# Altium PCB taktik_pcb.PcbDoc
Units mm, origin at the board's own origin, x right, y up, seen from the top; angles counter-clockwise.
Board outline 88.65 x 56.13 mm, 2 copper layers (Top Layer, Bottom Layer); 26 components, 13 nets, 90 pads, 0 vias.
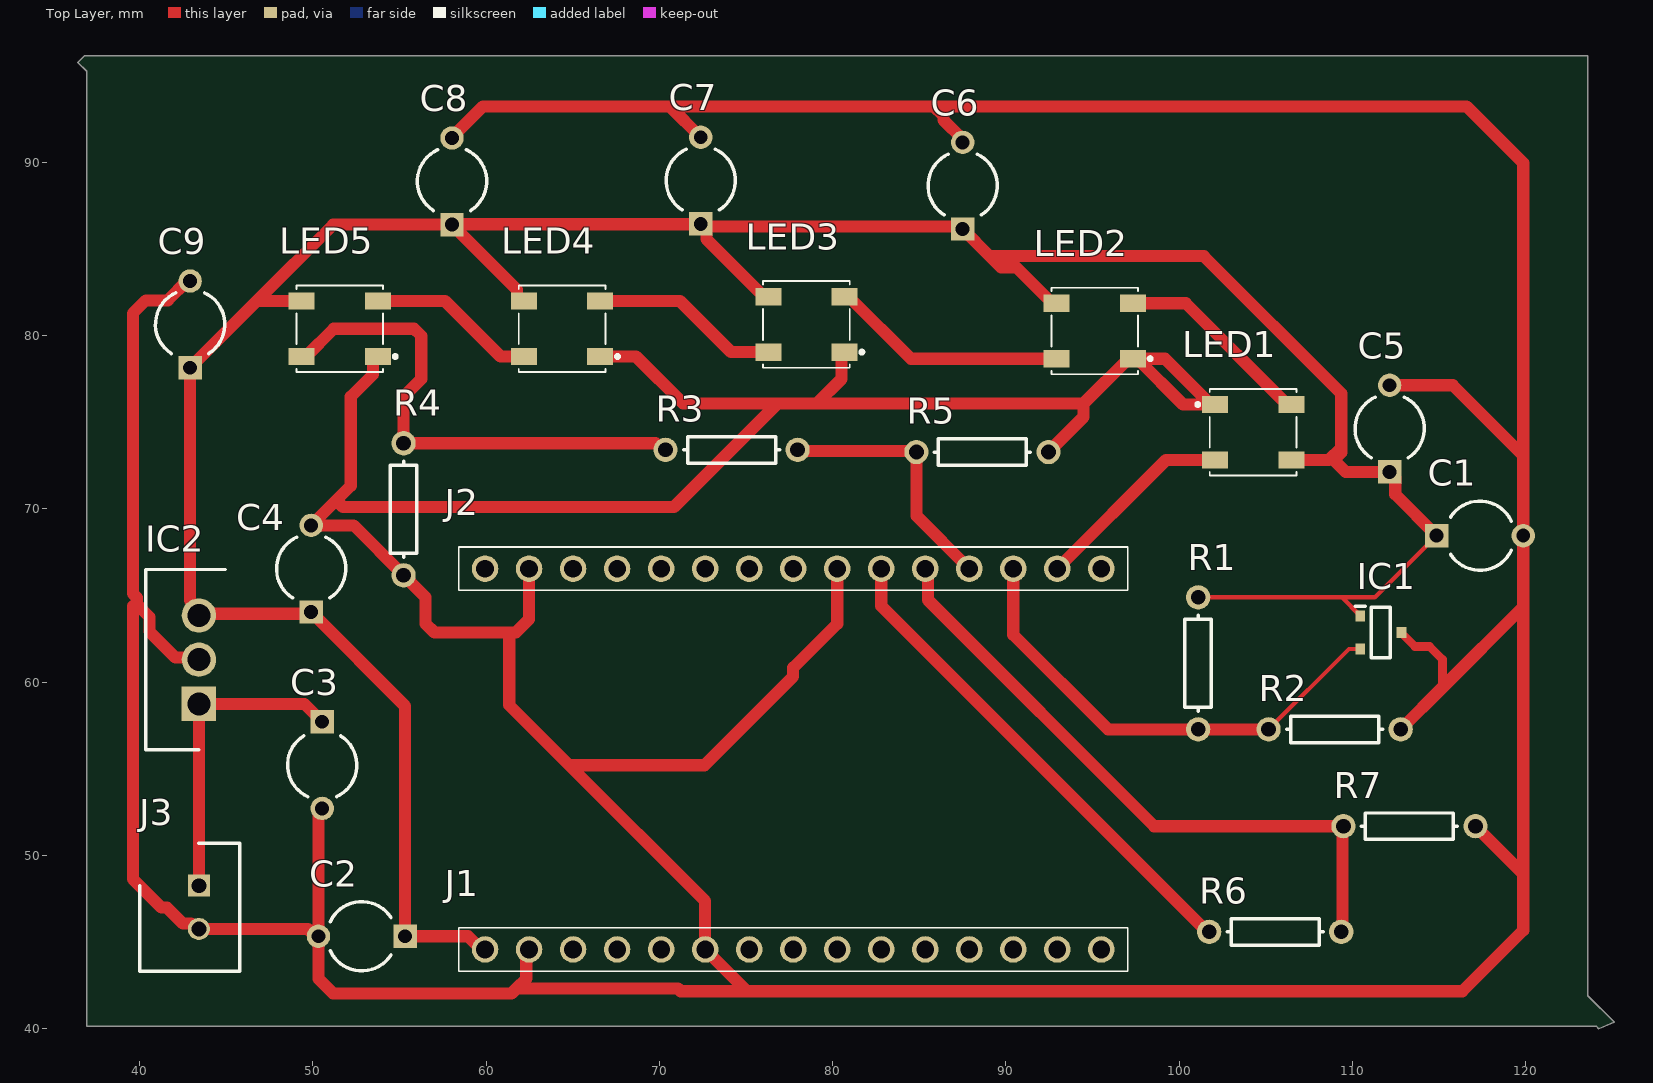
[diagram p0: Top Layer view]
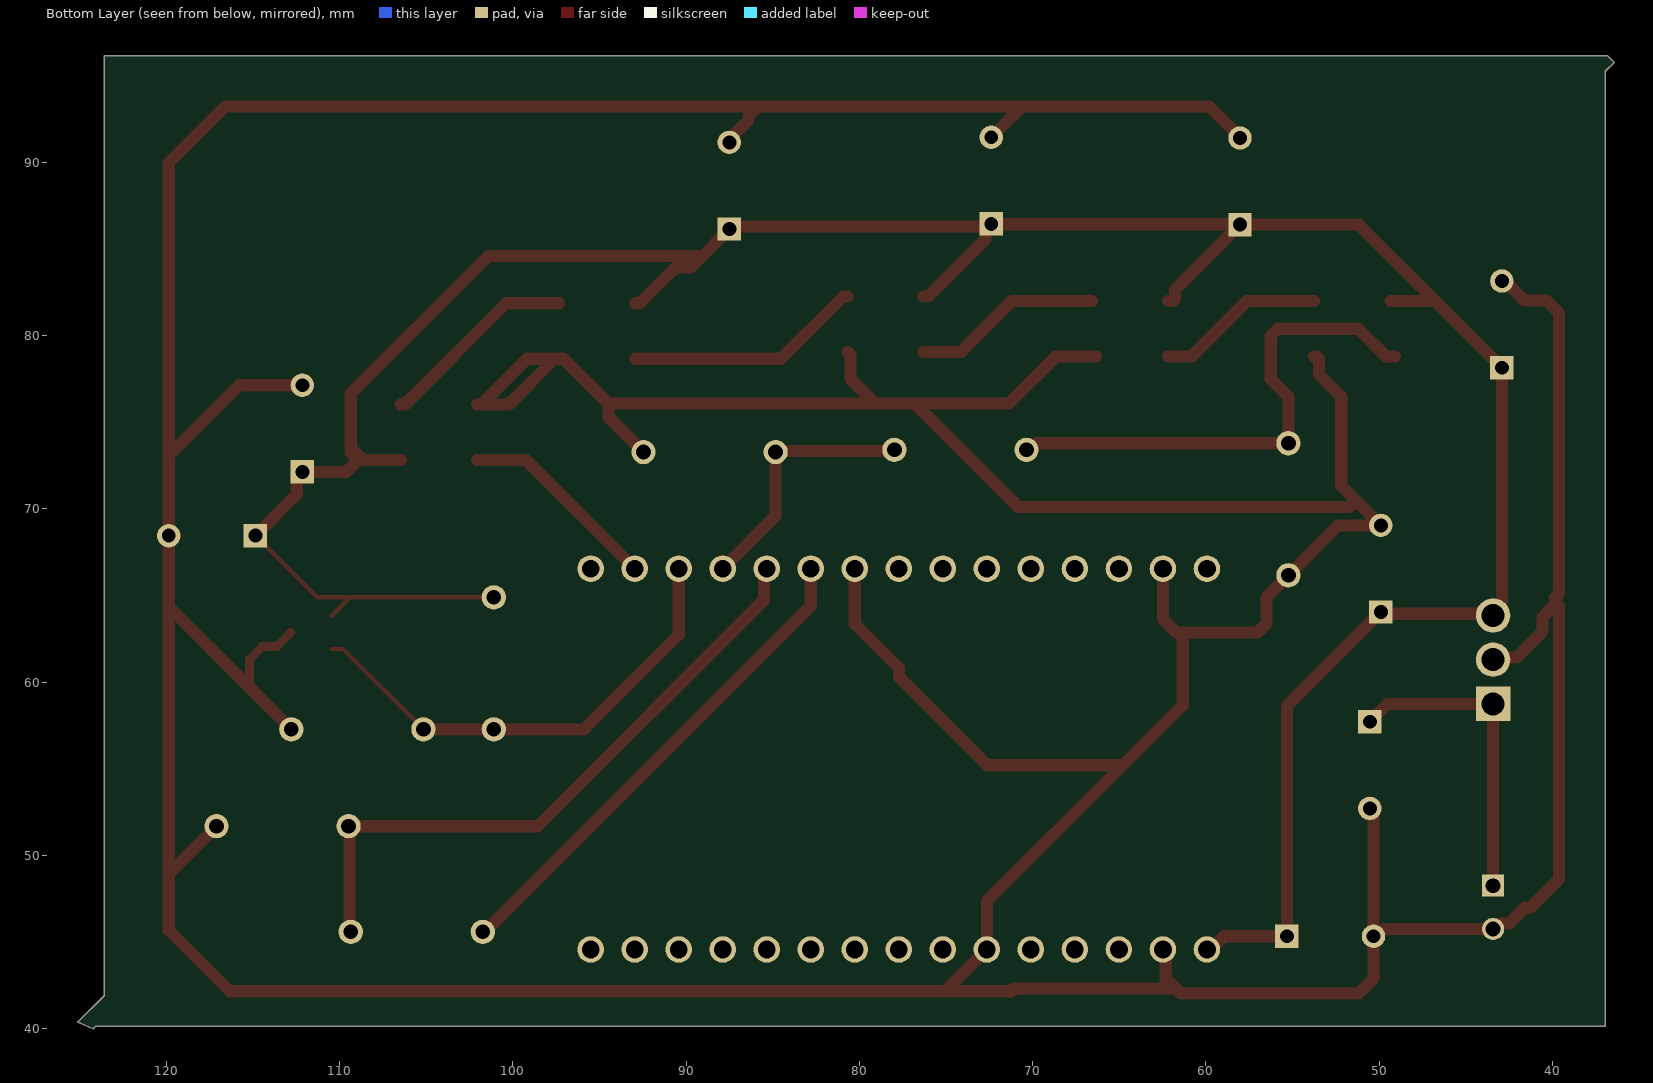
[diagram p1: Bottom Layer view, seen from below]

## Layer stack, top to bottom
Top Solder: solder mask 0.0102, Solder Resist, Dk 3.5
Top Layer: signal copper 0.0356
Dielectric 1: dielectric 0.32, FR-4, Dk 4.8
Bottom Layer: signal copper 0.0356
Bottom Solder: solder mask 0.0102, Solder Resist, Dk 3.5

## Board outline
125.095,40.386 123.571,41.91 123.571,96.139 36.83,96.139 36.449,95.758 36.957,95.25 36.957,40.132 124.079,40.132 124.206,40.005

## Design rules (kind name [scope] priority, off if disabled: settings)
Clearance [All] p1: gap=0.254 ignorepadtopadclearanceinfootprint=FALSE except(0: Arc-Hole Track-Hole SMDPad-Hole THPad-Hole Via-Hole Fill-Hole Poly-Hole Region-Hole Text-Hole)
PolygonConnect [All] p1: connectstyle=Relief reliefconductorwidth=0.254 reliefentries=4 polygonreliefangle="90 Angle" airgapwidth=0.254
RoomDefinition taktik [InComponentClass('taktik')] p1: confinementstyle=ConfineIn formatcopy=TRUE lockcomponents=FALSE outline 36.83,39.878 122.301,39.878 122.301,95.885 36.83,95.885
RoutingVias [All] p1: holewidth=1 width=1.27 viastyle="Through Hole" minholewidth=1 minwidth=1.27 maxholewidth=1 maxwidth=1.27
SolderMaskExpansion [All] p1: expansion=0.102 istentingtop=FALSE
Width [All] p1: maxlimit=0.7 minlimit=0.254 preferedwidth=0.5 minimp=50.000000 maximp=50.000000 favimp=50.000000
30 further rules are at their usual default settings.

## Classes and differential pairs
component class taktik: C1 C2 C3 C4 C5 C6 C7 C8 C9 IC1 IC2 J1 J2 J3 LED1 LED2 LED3 LED4 LED5 R1 R2 R3 R4 R5

## Components (designator, comment, footprint, x,y, rotation, side; value= is the part's Value field where it differs from the comment)
C1 "Cap2" CAPR5-4X5 117.348,68.453 r0 top value=0.47uF
C2 "Cap2" CAPR5-4X5 52.832,45.339 r180 top value=10uF
C3 "Cap2" CAPR5-4X5 50.546,55.214 r270 top value=0.33uF
C4 "Cap2" CAPR5-4X5 49.911,66.548 r90 top value=0.1uF
C5 "Cap2" CAPR5-4X5 112.141,74.633 r90 top value=10uF
C6 "Cap2" CAPR5-4X5 87.503,88.646 r90 top value=10uF
C7 "Cap2" CAPR5-4X5 72.39,88.94 r90 top value=10uF
C8 "Cap2" CAPR5-4X5 58.039,88.9 r90 top value=10uF
C9 "Cap2" CAPR5-4X5 42.926,80.645 r90 top value=10uF
IC1 "TCS40DPR,LF" SOTFL95P240X88-3N 111.633,62.865 r0 top
IC2 "L7805CV-DG" TO255P460X1020X2008-3P 43.434,58.75 r90 top
J1 "PRT-16279" PRT16279 95.504,44.577 r180 top
J2 "PRT-16279" PRT16279 95.504,66.548 r180 top
J3 "B2B-XH-A__LF__SN_" SHDR2W64P0X250_1X2_740X575X700P 43.434,48.26 r270 top
LED1 "IN-PI554FCH" INPI554FCH 104.267,74.422 r180 top
LED2 "IN-PI554FCH" INPI554FCH 95.123,80.264 r0 top
LED3 "IN-PI554FCH" INPI554FCH 78.486,80.645 r0 top
LED4 "IN-PI554FCH" INPI554FCH 64.389,80.391 r0 top
LED5 "IN-PI554FCH" INPI554FCH 51.562,80.391 r0 top
R1 "Res1" AXIAL-0.3 101.092,61.087 r270 top value="10K NC"
R2 "Res1" AXIAL-0.3 108.966,57.277 r0 top value=10K
R3 "Res1" AXIAL-0.3 74.168,73.406 r0 top value=0R
R4 "Res1" AXIAL-0.3 55.245,69.977 r270 top value="10K NC"
R5 "Res1" AXIAL-0.3 88.646,73.279 r0 top value=10k
R6 "Res1" AXIAL-0.3 105.537,45.593 r0 top value="10K NC"
R7 "Res1" AXIAL-0.3 113.284,51.689 r0 top value=10K

## Footprints (in the part's own frame and the unit in brackets; to place one, negate y for a bottom-side part, rotate by r counter-clockwise, add the part's x,y. Pads: shape width x height; smd on the part's side, far side on the other; paste and mask are expansions set on the pad)
AXIAL-0.3 [mm] "Axial Device, Thru-Hole; 2 Leads; 0.3 in Pin Spacing"
  round 1.4 hole 0.85: 1(-3.81,0) 2(3.81,0)
  silkscreen extent -2.77,-0.76 2.77,0.76
CAPR5-4X5 [mm] "Capacitor; 2 Leads"
  rect 1.35x1.35 hole 0.8: 1(-2.5,0)
  round 1.35 hole 0.8: 2(2.5,0)
  silkscreen extent -1.69,-2 1.82,2
INPI554FCH [mm]
  rect 1.5x1 smd: 1(2.2,-1.6) 2(2.2,1.6) 3(-2.2,1.6) 4(-2.2,-1.6)
  silkscreen extent -2.5,-2.5 3.3,2.5, body extent -2.5,-2.5 2.5,2.5, height 1.7
PRT16279 [mm]
  round 1.53 hole 1.02: 1(0,0) 2(2.54,0) 3(5.08,0) 4(7.62,0) 5(10.16,0) 6(12.7,0) 7(15.24,0) 8(17.78,0) 9(20.32,0) 10(22.86,0) 11(25.4,0) 12(27.94,0) 13(30.48,0) 14(33.02,0) 15(35.56,0)
  silkscreen extent -1.52,-1.25 37.08,1.25, body extent 6.1,-1.25 29.46,1.25, height 9.61
SHDR2W64P0X250_1X2_740X575X700P [mm]
  rect 1.275x1.275 hole 0.85: 1(0,0)
  round 1.275 hole 0.85: 2(2.5,0)
  silkscreen extent -2.45,-3.4 4.95,2.35, body extent -2.45,-2.88 4.95,2.88, height 7
SOTFL95P240X88-3N [mm]
  rect 0.575x0.62 smd: 1(-1.188,0.95) 2(-1.188,-0.95) 3(1.188,0)
  silkscreen extent -1.48,-1.45 0.55,1.51, body extent -1.2,-1.45 1.2,1.45, height 0.88
TO255P460X1020X2008-3P [mm]
  rect 1.98x1.98 hole 1.32: 1(0,0)
  round 1.98 hole 1.32: 2(2.55,0) 3(5.1,0)
  silkscreen extent -2.65,-1.53 7.75,3.07, body extent -2.55,-1.53 7.65,3.07, height 19.21

## Part data
C1 C2 C3 C4 C5 C6 C7 C8 C9: "Capacitor", PackageDescription="Capacitor; 2 Leads", PackageReference=CAPR5-4X5, Published=23-Sep-2002, Publisher="Altium Limited"
IC1: "Integrated Circuit", Manufacturer_Name=Toshiba, Mouser Part Number=757-TCS40DPRLF, Arrow Part Number=TCS40DPR,LF, Arrow Price/Stock=https://www.arrow.com/en/products/tcs40dprlf/toshiba?region=nac, Datasheet Link=http://toshiba.semicon-storage.com/info/docget.jsp?did=30107&prodName=TCS40DPR, Height=0.88mm, Manufacturer_Part_Number=TCS40DPR,LF, Mouser Price/Stock=https://www.mouser.co.uk/ProductDetail/Toshiba/TCS40DPRLF?qs=GSXfdiLIrOHqR%252B5sANTKJA%3D%3D
IC2: "Integrated Circuit", Manufacturer_Name=STMicroelectronics, Mouser Part Number=511-L7805CV-DG, Arrow Part Number=L7805CV-DG, Arrow Price/Stock=https://www.arrow.com/en/products/l7805cv-dg/stmicroelectronics?region=nac, Datasheet Link=http://www.st.com/web/en/resource/technical/document/datasheet/CD00000444.pdf, Height=4.6mm, Manufacturer_Part_Number=L7805CV-DG, Mouser Price/Stock=https://www.mouser.co.uk/ProductDetail/STMicroelectronics/L7805CV-DG?qs=T%2FOtf55vL7c3O0as9P9fAw%3D%3D
J1 J2: "Connector", Manufacturer_Name=SparkFun, Datasheet Link=https://cdn.sparkfun.com/assets/8/d/8/4/7/DS-16279-Arduino_Nano_Stackable_Header_Kit.pdf, Height=8.65mm, Manufacturer_Part_Number=PRT-16279
J3: "Connector", Manufacturer_Name="JST (JAPAN SOLDERLESS TERMINALS)", Manufacturer_Part_Number="B2B-XH-A (LF)(SN)", Datasheet Link=http://www.farnell.com/datasheets/5448.pdf, Height=7mm
LED1 LED2 LED3 LED4 LED5: "LED", Manufacturer_Name=Inolux, Mouser Part Number=743-IN-PI554FCH, Arrow Part Number=IN-PI554FCH, Arrow Price/Stock=https://www.arrow.com/en/products/in-pi554fch/inolux-corporation?region=nac, Datasheet Link=https://www.mouser.com/datasheet/2/180/IN-PI554FCH-1488538.pdf, Height=1.6mm, Manufacturer_Part_Number=IN-PI554FCH, Mouser Price/Stock=https://www.mouser.co.uk/ProductDetail/Inolux/IN-PI554FCH?qs=fAHHVMwC%252BbilHshFvT0Xwg%3D%3D
R1 R2 R3 R4 R5 R6 R7: "Resistor", LatestRevisionDate=17-Jul-2002, LatestRevisionNote="Re-released for DXP Platform.", PackageDescription="Axial Device, Thru-Hole; 2 Leads; 0.3 in Pin Spacing", PackageReference=AXIAL-0.3, Published=8-Jun-2000, Publisher="Altium Limited"

## Nets (pads, with @x,y where several pads share a name; then routed paths per layer and width w, separated by ;. In a path a pad name is that pad's centre, name@x,y a point inside that pad or via, vN(x,y) a via of type N, cw(c..) or ccw(c..) an arc to the next point about the centre after c; other vN are vias at no path point)
3V3: J2.6 R6.1 | length 28.9
  Top Layer w0.7: J2.6 82.804,64.389 101.6,45.593 R6.1
5V: C3.1 IC2.1 J3.1 | length 18
  Top Layer w0.7: J3.1 IC2.1 49.51,58.75 C3.1
BP: J2.5 R6.2 R7.1 | length 37.4
  Top Layer w0.7: J2.5 85.503,66.389 85.503,64.738 98.552,51.689 R7.1 109.41,51.625 109.41,45.657 R6.2
GND: C1.2 C2.2 C3.2 C4.2 C5.2 C6.2 C7.2 C8.2 C9.2 IC1.3 IC2.2 J1.10 J1.14 J2.7 J2.14 J3.2 LED1.1 LED2.1 LED3.1 LED4.1 LED5.1 R2.2 R4.2 R5.2 R7.2 | length 438.7
  Top Layer w0.5: IC1.3 112.821,62.843 113.605,62.059 114.443,62.059 115.189,61.312 115.189,59.69
  Top Layer w0.7: 39.624,64.396 39.624,48.641 41.275,46.99 41.589,46.99 42.511,46.067 42.971,46.067 43.278,45.76 J3.2 49.735,45.76 50.156,45.339 C2.2 ; C9.2 42.75,83.145 41.636,82.031 40.375,82.031 39.624,81.28 39.624,65.11 39.862,64.872 39.862,64.482 40.576,63.767 40.576,62.929 42.077,61.428 43.306,61.428 IC2.2 ; C3.2 50.546,52.538 50.332,52.324 C2.2 ; LED5.1 53.622,78.791 53.472,78.641 53.472,77.746 52.197,76.471 52.197,71.334 51.355,70.492 ; C8.2 58.039,91.44 59.817,93.218 70.612,93.218 ; J1.14 62.325,44.418 62.325,42.894 61.758,42.327 ; J2.14 62.484,63.627 61.722,62.865 61.341,62.865 ; LED4.1@66.339,78.791 LED4.1 68.656,78.791 71.374,76.073 76.822,76.073 ; C7.2 70.612,93.218 ; J2.7 80.264,63.373 77.724,60.833 77.724,60.325 72.603,55.204 64.811,55.204 ; LED3.1 80.664,79.045 80.514,78.895 80.514,77.495 79.092,76.073 ; C6.2 87.503,91.322 86.389,92.436 86.389,92.681 85.852,93.218 ; R5.2 94.482,75.305 94.482,76.073 ; LED1.1 LED1.1@101.817,76.022 ; C5.2 115.78,77.133 119.848,73.065 ; R2.2 115.189,59.69 119.848,64.349 ; R7.2 119.848,48.935 ; C2.2 50.332,42.886 51.181,42.037 61.468,42.037 61.758,42.327 ; 51.355,70.492 C4.2 52.364,69.048 R4.2 56.515,64.897 56.515,63.373 57.023,62.865 61.341,62.865 ; 51.355,70.492 51.744,70.104 70.853,70.104 76.822,76.073 ; 61.341,62.865 61.341,58.674 64.811,55.204 ; 61.758,42.327 71.077,42.327 71.24,42.164 75.057,42.164 ; 64.811,55.204 72.644,47.371 J1.10 75.057,42.164 ; 70.612,93.218 85.852,93.218 ; 75.057,42.164 116.332,42.164 119.848,45.68 119.848,48.935 ; 76.822,76.073 79.092,76.073 ; 79.092,76.073 94.482,76.073 ; 85.852,93.218 116.586,93.218 119.848,89.956 119.848,73.065 ; 94.482,76.073 97.073,78.664 LED2.1 LED2.1@97.573,78.664 ; LED2.1@97.573,78.664 99.175,78.664 LED1.1@101.817,76.022 ; LED2.1@97.573,78.664 100.215,76.022 LED1.1@101.817,76.022 ; 119.848,48.935 119.848,64.349 ; 119.848,64.349 C1.2 119.848,73.065
NetLED1_4: LED1.4 LED2.2 | length 11.6
  Top Layer w0.7: LED2.2 100.375,81.864 106.217,76.022 LED1.4
NetLED2_4: LED2.4 LED3.2 | length 13.7
  Top Layer w0.7: LED3.2 80.936,82.245 84.517,78.664 LED2.4
NetLED3_4: LED3.4 LED4.2 | length 10.9
  Top Layer w0.7: LED4.2 71.194,81.991 74.14,79.045 LED3.4
NetLED4_4: LED4.4 LED5.2 | length 9.8
  Top Layer w0.7: LED5.2 57.634,81.991 60.834,78.791 LED4.4
P5V: C1.1 C2.1 C4.1 C5.1 C6.1 C7.1 C8.1 C9.1 IC1.1 IC2.3 J1.15 LED1.3 LED2.3 LED3.3 LED4.3 LED5.3 R1.1 | length 172.7
  Top Layer w0.254: R1.1 109.385,64.897 ; IC1.1 110.445,63.837 109.385,64.897 ; C1.1 111.292,64.897 109.385,64.897
  Top Layer w0.7: LED5.3 46.772,81.991 ; J1.15 59.719,44.577 58.957,45.339 C2.1 55.332,58.627 C4.1 49.812,63.949 43.533,63.949 IC2.3 43.434,64.196 42.926,64.704 C9.1 46.772,81.991 ; LED4.3 61.939,81.991 61.789,82.141 61.789,82.65 C8.1 ; LED3.3 76.036,82.245 72.715,85.566 72.715,86.115 C7.1@72.537,86.293 ; LED2.3 92.673,81.864 90.619,83.918 89.731,83.918 89.067,84.582 ; LED1.3 108.647,72.822 109.347,73.522 ; C1.1 112.466,70.835 112.466,71.808 C5.1 109.611,72.133 108.922,72.822 109.347,73.247 109.347,73.522 ; 46.772,81.991 51.181,86.4 C8.1 ; C8.1 58.059,86.42 72.37,86.42 C7.1 C7.1@72.537,86.293 ; C7.1@72.537,86.293 87.356,86.293 C6.1 89.067,84.582 ; 89.067,84.582 101.421,84.582 109.347,76.656 109.347,73.522
RX_LED: J2.2 LED1.2 | length 11.7
  Top Layer w0.7: J2.2 99.238,72.822 LED1.2
RX_MAG: IC1.2 J2.3 R1.2 R2.1 | length 28
  Top Layer w0.254: R2.1 109.794,61.915 IC1.2
  Top Layer w0.7: J2.3 90.424,62.738 95.885,57.277 R1.2 R2.1
Step: LED5.4 R3.1 R4.1 | length 29.9
  Top Layer w0.7: LED5.4@49.112,78.791 LED5.4 49.612,78.791 51.212,80.391 55.851,80.391 56.261,79.981 56.261,77.487 55.245,76.471 R4.1 69.788,73.787 70.169,73.406 R3.1
TX_LED: J2.4 R3.2 R5.1 | length 14.9
  Top Layer w0.7: R3.2 78.041,73.343 84.772,73.343 R5.1 84.836,69.596 J2.4
pads on no net: J1.1 J1.2 J1.3 J1.4 J1.5 J1.6 J1.7 J1.8 J1.9 J1.11 J1.12 J1.13 J2.1 J2.8 J2.9 J2.10 J2.11 J2.12 J2.13 J2.15